# Altium PCB Boost Converter.PcbDoc
Units mm, origin at the board's own origin, x right, y up, seen from the top; angles counter-clockwise.
Board outline 47.5 x 34.5 mm, 2 copper layers (Top Layer, Bottom Layer), stack 1.581 mm thick; 11 components, 7 nets, 30 pads, 20 vias.
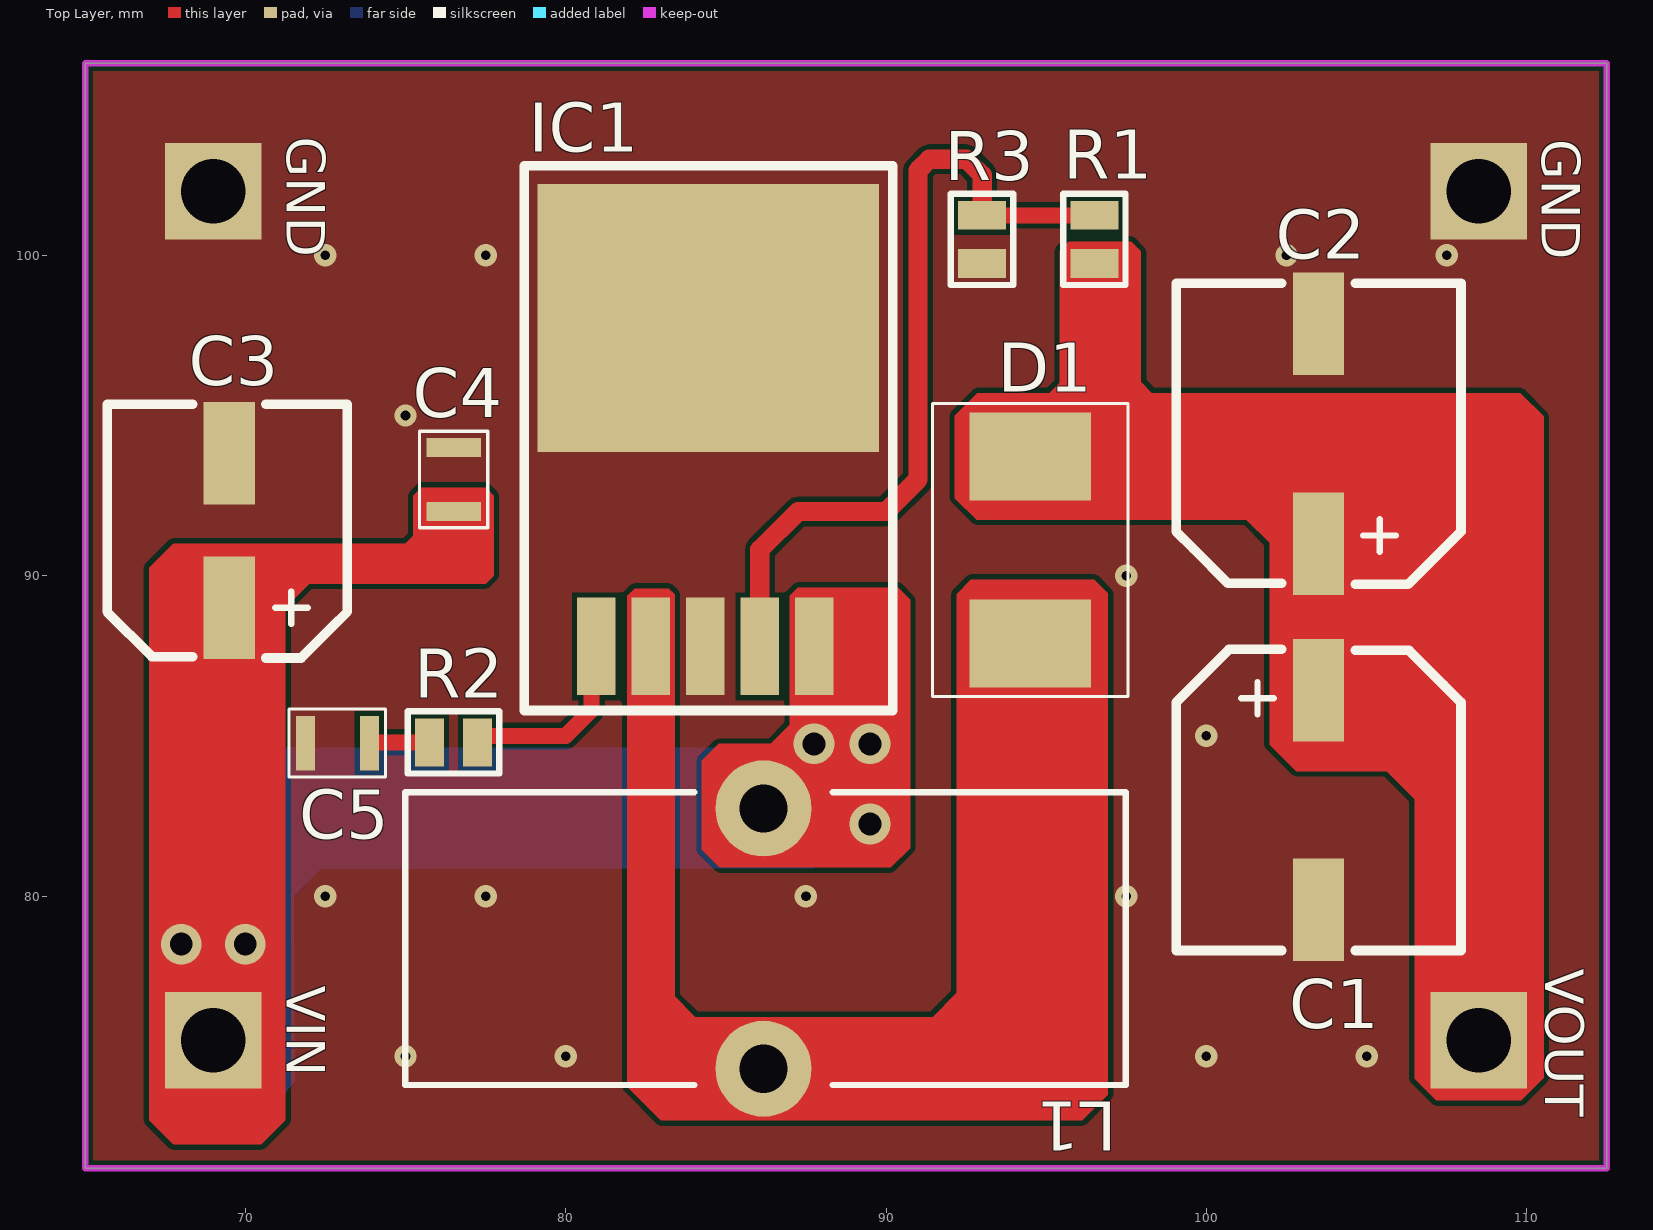
[diagram p0: Top Layer view]
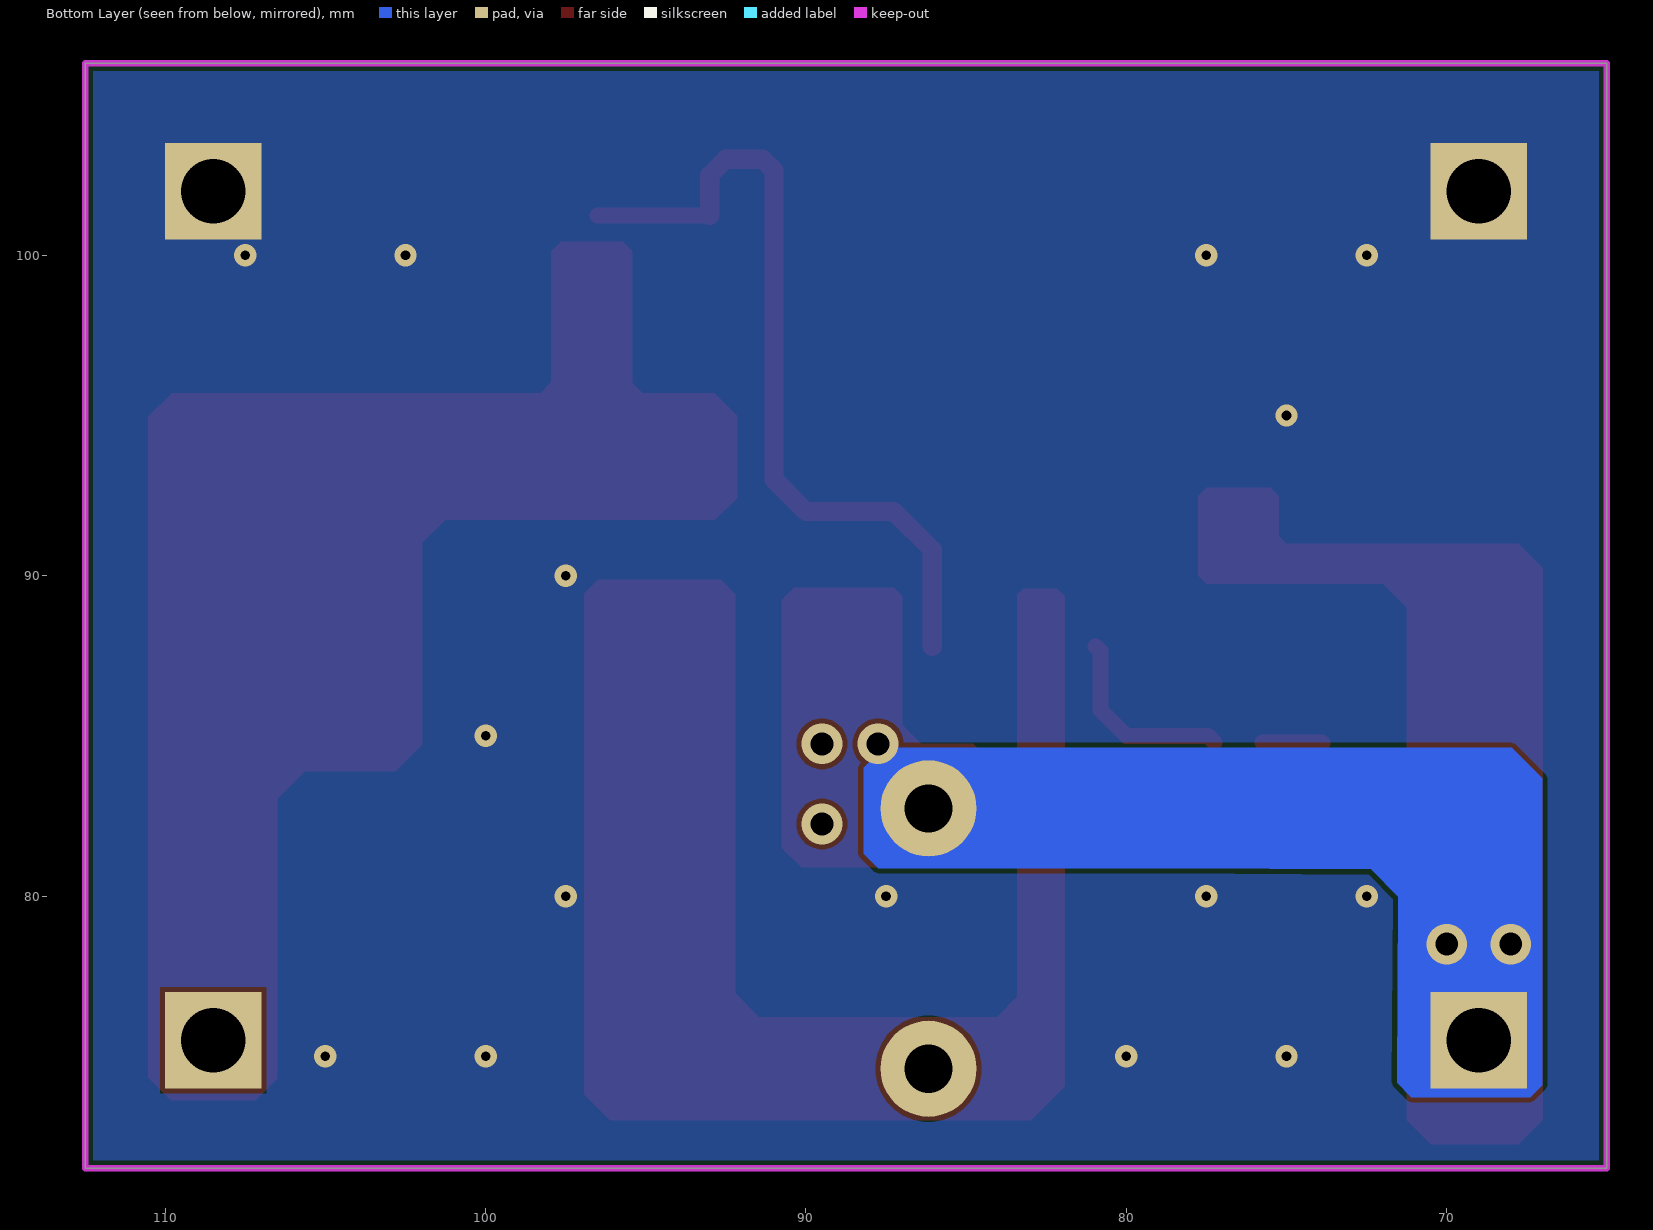
[diagram p1: Bottom Layer view, seen from below]
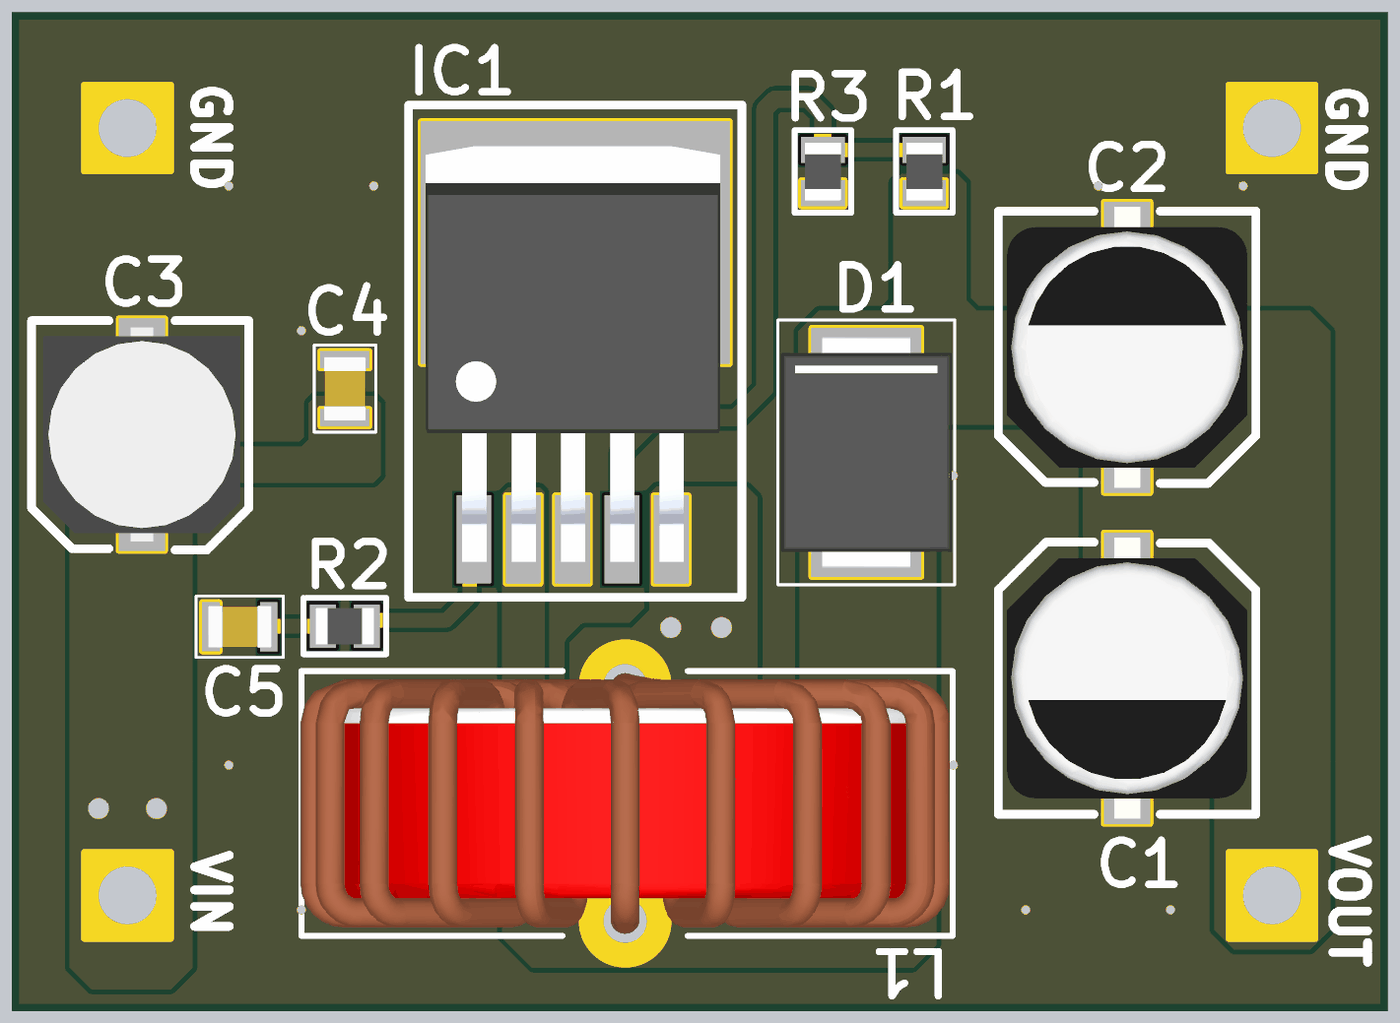
[diagram p2: 3D render of the assembled board from above, using the file's embedded part models]

## Layer stack, top to bottom
Top Solder: solder mask 0.0102, Solder Resist, Dk 3.5
Top Layer: signal copper 0.0356
Dielectric 1: dielectric 1.51, FR-4, Dk 4.8
Bottom Layer: signal copper 0.0356
Bottom Solder: solder mask 0.0102, Solder Resist, Dk 3.5

## Board outline
65,72.5 65,106 112.5,106 112.5,71.5 65,71.5

## Design rules (kind name [scope] priority, off if disabled: settings)
Clearance Clearance_1 [All] p1: gap=0.152 ignorepadtopadclearanceinfootprint=FALSE
Clearance [InPolygon] p2: gap=0.25 ignorepadtopadclearanceinfootprint=FALSE
PolygonConnect [All] p1: connectstyle=Direct reliefconductorwidth=0.254 reliefentries=4 polygonreliefangle="90 Angle" airgapwidth=0.254
RoutingVias [All] p1: holewidth=0.5 width=0.8 viastyle="Through Hole" minholewidth=0.3 minwidth=0.5 maxholewidth=1 maxwidth=2
SolderMaskExpansion [All] p1: expansion=0.102 istentingtop=FALSE
Width [All] p1: maxlimit=3 minlimit=0.152 preferedwidth=0.5
30 further rules are at their usual default settings.

## Components (designator, comment, footprint, x,y, rotation, side; value= is the part's Value field where it differs from the comment)
C1 "100uF" EEE-FK1H101P 103.5,83 r270 top
C2 "100uF" EEE-FK1H101P 103.5,94.429 r90 top
C3 "56uF" UWD1V560MCL1GS 69.5,91.413 r90 top
C4 "0.1uF" CAP-0805 76.5,93 r270 top
C5 "0.68uF" CAP-0805 72.875,84.775 r0 top
D1 "SURS8360T3G" SURS8360 94.5,90.8 r90 top
IC1 "LM2587" D2PAK 84.409,92.944 r0 top
L1 "100uH" 7447070 86.175,78.675 r0 top
R1 "56K" RES-0805 96.5,100.5 r270 top
R2 "3K" RES-0805 76.5,84.8 r0 top
R3 "2K" RES-0805 93,100.5 r90 top

## Footprints (in the part's own frame and the unit in brackets; to place one, negate y for a bottom-side part, rotate by r counter-clockwise, add the part's x,y. Pads: shape width x height; smd on the part's side, far side on the other; paste and mask are expansions set on the pad)
7447070 [mm]
  round 3 hole 1.5: 1(0,4.064) 2(0,-4.064)
  silkscreen extent -11.18,-4.57 11.3,4.57, body extent -11.21,-4.5 11.21,4.5, height 22.21
CAP-0805 [mm]
  rect 0.6x1.7 smd: 1(-1,0) 2(1,0)
  silkscreen extent -1.51,-1.06 1.5,1.07, body extent -1.1,-0.72 1.1,0.73, height 1.45
D2PAK [mm]
  rect 1.2x3.05 smd: 1(-3.454,-5.15) 2(-1.752,-5.15) 3(-0.05,-5.15) 4(1.652,-5.15) 5(3.354,-5.15)
  rect 10.66x8.38 smd: 3(0.046,5.1)
  silkscreen extent -5.7,-7.15 5.8,9.85, body extent -5.11,-5.93 5.05,8.42, height 4.65
EEE-FK1H101P [mm]
  rect 3.2x1.6 smd: 1(-3.429,0) 2(3.429,0)
  silkscreen extent -4.7,-4.45 4.7,4.45, body extent -4.85,-4.15 4.85,4.15, height 10.2
RES-0805 [mm]
  rect 0.9x1.5 smd: 1(-0.75,0) 2(0.75,0)
  silkscreen extent -1.42,-0.97 1.43,0.97, body extent -1,-0.63 1,0.63, height 0.65
SURS8360 [mm]
  rect 2.75x3.79 smd: 1(-2.921,0) 2(2.921,0)
  silkscreen extent -4.57,-3.05 4.57,3.05, body extent -3.98,-2.95 3.98,2.95, height 2.6
UWD1V560MCL1GS [mm]
  rect 3.2x1.6 smd: 1(-2.413,0) 2(2.413,0)
  silkscreen extent -3.98,-3.68 3.94,3.81, body extent -3.7,-3.4 3.7,3.4, height 8.05

## Free pads (board coordinates)
  rect 3x3 hole 2: ""(69,75.5) ""(69,102) ""(108.5,75.5) ""(108.5,102)

## Via types
v1: diameter 0.7, hole 0.3, Top Layer to Bottom Layer, tented both sides, 15 vias
v2: diameter 1.27, hole 0.711, Top Layer to Bottom Layer, tented both sides, 5 vias

## Nets (pads, with @x,y where several pads share a name; then routed paths per layer and width w, separated by ;. In a path a pad name is that pad's centre, name@x,y a point inside that pad or via, vN(x,y) a via of type N, cw(c..) or ccw(c..) an arc to the next point about the centre after c; other vN are vias at no path point)
GND: C1.2 C2.2 C3.2 C4.1 C5.1 IC1.3 pad.@69,102 pad.@108.5,102 R3.1
  other v1: 75,75 80,75 100,75 105,75 72.5,80 77.5,80 87.5,80 97.5,80 100,85 97.5,90 75,95 72.5,100 77.5,100 102.5,100 107.5,100
NetC5_2: C5.2 R2.1 | length 1.9
  Top Layer w0.5: C5.2 73.9,84.8 R2.1
NetD1_1: D1.1 IC1.2 L1.2
NetR1_1: IC1.4 R1.1 R3.2 | length 25.6
  Top Layer w0.5: R3.2 R1.1
  Top Layer w0.6: IC1.4 86.061,90.811 87.25,92 90,92 91,93 91,102.649 91.351,103 92.5,103 93,102.5 R3.2
NetR2_2: IC1.1 R2.2 | length 6
  Top Layer w0.5: R2.2 77.45,85 80,85 80.812,85.812 80.812,87.651 IC1.1
VIN: C3.1 C4.2 IC1.5 L1.1 pad.@69,75.5
  other v2: 68,78.5 70,78.5 89.5,82.25 87.75,84.75 89.5,84.75
VOUT: C1.1 C2.1 D1.2 pad.@108.5,75.5 R1.2

## Polygon pours and split planes (outlines as drawn)
GND on Bottom Layer "GND_L02_P000" (solid, pour order 0): 65,106 65,71.5 112.5,71.5 112.5,106
GND on Top Layer "GND_L01_P001" (solid, pour order 1): 65,106 65,71.5 112.5,71.5 112.5,106

## Keep-outs
Keep-Out Layer:
  the board outline again, w0.2

## Other copper
Top Layer:
  region net VIN: 67.75,91 75,91 75.25,91.25 75.25,92.5 75.5,92.75 77.5,92.75 77.75,92.5 77.75,90 77.5,89.75 72,89.75 71.25,89 71.25,73 70.5,72.25 67.75,72.25 67,73 67,90.25
  region net NetD1_1: 81.925,89.375 82.15,89.6 83.225,89.6 83.4,89.425 83.4,76.875 84.05,76.225 91.45,76.225 92.2,76.975 92.2,89.425 92.65,89.875 96.5,89.875 96.925,89.45 96.925,73.8 96.125,73 82.975,73 81.925,74.05
  region net VIN: 87,89.375 87.25,89.625 90.375,89.625 90.75,89.25 90.75,81.5 90.15,80.9 84.8,80.9 84.25,81.45 84.25,84.225 84.775,84.75 86.4,84.75 87,85.35
  region net VOUT: 109.8,95.7 98.3,95.7 97.95,96.05 97.95,100.121 97.646,100.425 95.7,100.425 95.425,100.15 95.425,96.025 95.1,95.7 92.85,95.7 92.15,95 92.15,92.425 92.825,91.75 101.25,91.75 101.975,91.025 101.975,84.725 102.8,83.9 105.625,83.9 106.5,83.025 106.5,74.3 107.175,73.625 109.825,73.625 110.525,74.325 110.525,91.107 110.525,94.975
Bottom Layer:
  region net VIN: 67.025,74.1 67.4,73.725 71.101,73.725 71.547,74.174 71.506,79.974 72.351,80.831 78.7,80.875 87.75,80.875 88.2,81.325 88.2,84 87.575,84.625 74.825,84.625 67.975,84.625 67.025,83.675 67.025,76.825

## Silkscreen, mask and mechanical layers (free items; w line width, h text height)
Top Overlay:
  text "GND" at 71.3,103.7 h1.2 r270
  text "GND" at 110.471,103.63 h1.2 r270
  text "VOUT" at 110.583,77.73 h1.2 r270
  text "VIN" at 71.3,77.2 h1.2 r270